# Altium PCB CE_BJTInfineonSOT343_v1.PcbDoc
Units mm, origin at the board's own origin, x right, y up, seen from the top; angles counter-clockwise.
Board outline 40 x 8 mm, 2 copper layers (Top Layer, Bottom Layer); 28 components, 11 nets, 63 pads, 4 vias.
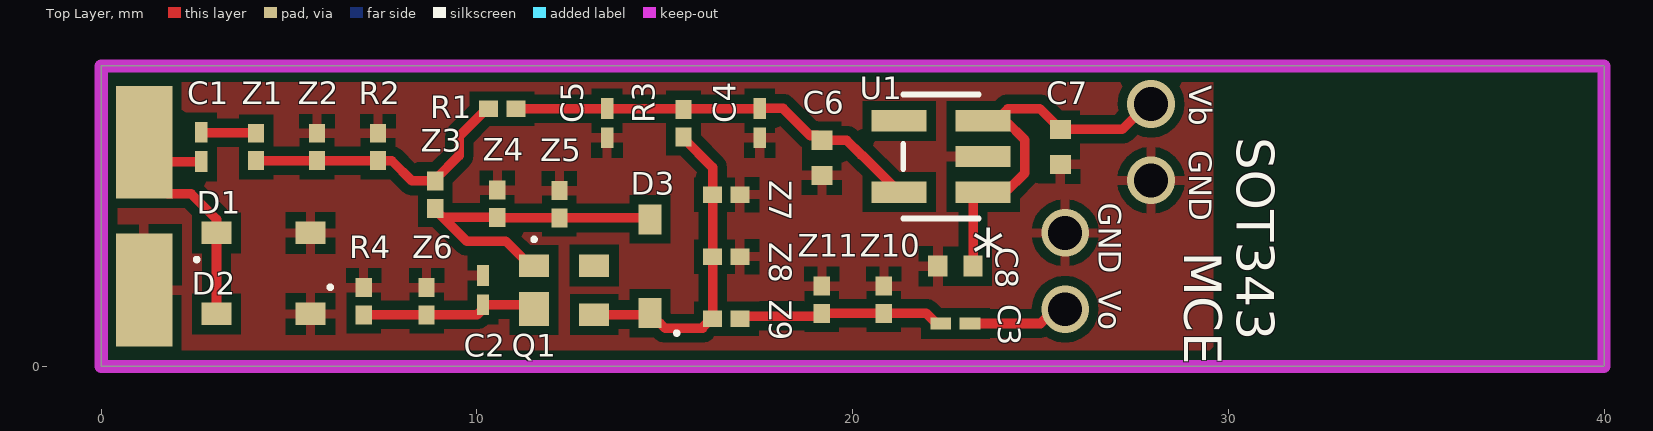
[diagram p0: Top Layer view]
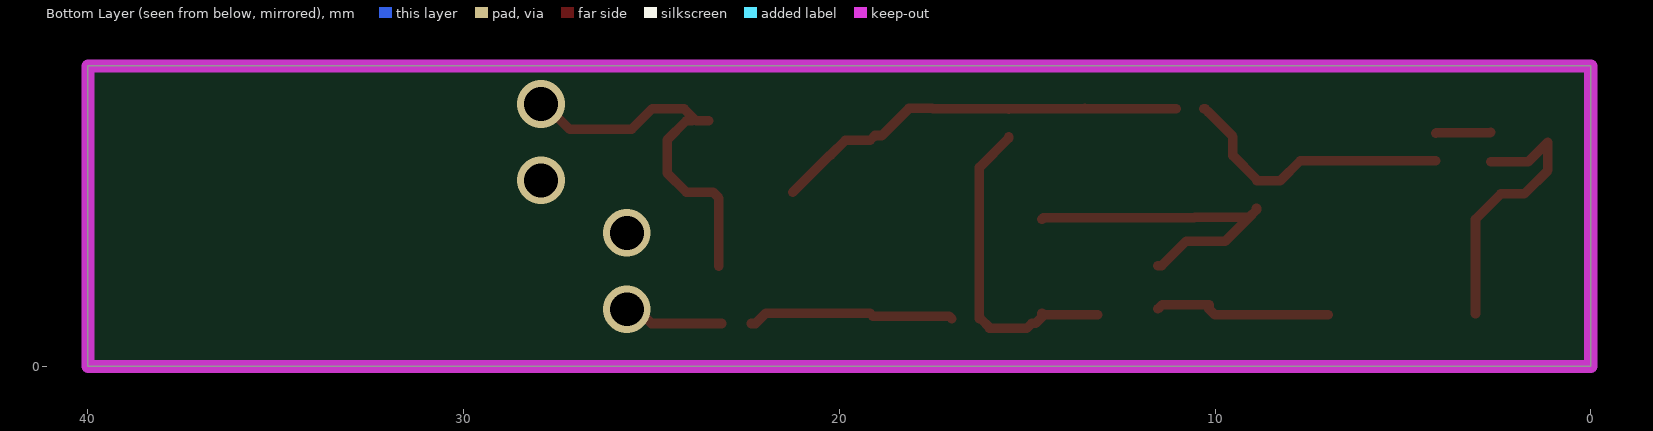
[diagram p1: Bottom Layer view, seen from below]

## Layer stack, top to bottom
Top Solder: solder mask 0.0102, Solder Resist, Dk 3.5
Top Layer: signal copper 0.0356
Dielectric 1: dielectric 0.32, FR-4, Dk 4.8
Bottom Layer: signal copper 0.0356
Bottom Solder: solder mask 0.0102, Solder Resist, Dk 3.5

## Board outline
0,0 40,0 40,8.001 0,8

## Design rules (kind name [scope] priority, off if disabled: settings)
Clearance [All] p1: gap=0.254 ignorepadtopadclearanceinfootprint=FALSE except(0: Arc-Hole Track-Hole SMDPad-Hole THPad-Hole Via-Hole Fill-Hole Poly-Hole Region-Hole Text-Hole)
PolygonConnect [All] p1: connectstyle=Relief reliefconductorwidth=0.254 reliefentries=4 polygonreliefangle="90 Angle" airgapwidth=0.254
RoomDefinition CE_BJTInfineonSOT343_v1 [InComponentClass('CE_BJTInfineonSOT343_v1')] p1: confinementstyle=ConfineIn formatcopy=TRUE lockcomponents=FALSE outline 0,8.001 40.005,8.001 40.005,0 0,0
RoutingVias [All] p1: holewidth=0.711 width=1.27 viastyle="Through Hole" minholewidth=0.711 minwidth=1.27 maxholewidth=0.711 maxwidth=1.27
SolderMaskExpansion [All] p1: expansion=0.102
Width [All] p1: maxlimit=0.254 minlimit=0.254 preferedwidth=0.254
30 further rules are at their usual default settings.

## Components (designator, comment, footprint, x,y, rotation, side; value= is the part's Value field where it differs from the comment)
C1 "Cin" C0201 2.667,5.842 r90 top value=Value
C2 "" C0201 10.16,2.032 r270 top value=Value
C3 "" C0201 22.733,1.143 r0 top value=Value
C4 "" CAP_CBR_0201 17.526,6.477 r90 top value=Value
C5 "" CAP_CBR_0201 13.462,6.477 r90 top value=Value
C6 "" YAG_CC0402 19.177,5.55 r90 top value=Value
C7 "" YAG_CC0402 25.527,5.842 r90 top value=Value
C8 "" YAG_CC0402 22.733,2.667 r0 top value=Value
D1 "" INF-SOD323_V 4.318,3.556 r90 top
D2 "" INF-SOD323_V 4.318,1.397 r270 top
D3 "" INF-SOD323_V 14.605,2.667 r180 top
Q1 "SOT343" INF-SOT343_V 12.319,2.032 r0 top
R1 "" RES_RC0201_P6XP3 10.668,6.858 r0 top value=Value
R2 "" RES_RC0201_P6XP3 7.366,5.842 r270 top value=Value
R3 "" RES_RC0201_P6XP3 15.494,6.477 r90 top value=Value
R4 "" RES_RC0201_P6XP3 6.985,1.738 r270 top value=Value
U1 "" DBV5 22.352,5.588 r180 top value=Value
Z1 "" RES_RC0201_P6XP3 4.123,5.842 r270 top value=Value
Z2 "" RES_RC0201_P6XP3 5.744,5.842 r270 top value=Value
Z3 "" RES_RC0201_P6XP3 8.89,4.572 r270 top value=Value
Z4 "" RES_RC0201_P6XP3 10.541,4.333 r270 top value=Value
Z5 "" RES_RC0201_P6XP3 12.192,4.318 r270 top value=Value
Z6 "" RES_RC0201_P6XP3 8.661,1.738 r270 top value=Value
Z7 "" RES_RC0201_P6XP3 16.637,4.572 r180 top value=Value
Z8 "" RES_RC0201_P6XP3 16.637,2.921 r180 top value=Value
Z9 "" RES_RC0201_P6XP3 16.637,1.27 r0 top value=Value
Z10 "" RES_RC0201_P6XP3 20.828,1.778 r270 top value=Value
Z11 "" RES_RC0201_P6XP3 19.177,1.778 r270 top value=Value

## Footprints (in the part's own frame and the unit in brackets; to place one, negate y for a bottom-side part, rotate by r counter-clockwise, add the part's x,y. Pads: shape width x height; smd on the part's side, far side on the other; paste and mask are expansions set on the pad)
C0201 [mil]
  rect 21.78x13 smd paste+0 mask+0: 1(-15.39,0) 2(15.39,0)
  body extent 0,0 10,10, height 10
CAP_CBR_0201 [mil]
  rect 21.78x13 smd paste+0 mask+0: 1(-15.39,0) 2(15.39,0)
  body extent 0,0 10,10, height 10
DBV5 [mil]
  rect 57.56x22.36 smd paste+0 mask+0: 1(-44,37.4) 2(-44,0) 3(-44,-37.4) 4(44,-37.4) 5(44,37.4)
  silkscreen extent -40,-65 40,65, body extent 0,0 10,10, height 10
INF-SOD323_V [mm] "SOD, 2-Leads, Body 1.7x1.25 mm"
  rect 0.6x0.8 smd: 1(0,1.25) 2(0,-1.25)
  silkscreen extent -0.76,1.73 -0.66,1.83, body extent -0.63,-0.85 0.63,0.85, height 1.1
INF-SOT343_V [mm] "SOT343, 4-Leads, Body 2x1.25 mm"
  rect 0.8x0.6 smd: 1(-0.8,0.65) 3(0.8,-0.65) 4(0.8,0.65)
  rect 0.8x0.9 smd: 2(-0.8,-0.5)
  silkscreen extent -0.85,1.3 -0.75,1.4, body extent -0.63,-1 0.63,1, height 1
RES_RC0201_P6XP3 [mm]
  rect 0.503x0.43 smd paste+0 mask+0: 1(-0.366,0) 2(0.366,0)
  body extent 0,0 0.25,0.25, height 0.25
YAG_CC0402 [mil]
  rect 20x22 smd paste+0 mask+0: 1(-18.5,0) 2(18.5,0)
  body extent 0,0 10,10, height 10

## Part data
C1 C2 C3: library part C0201C270J3GACTU, "No Description Available", Built_By=EMA_UL_Team, Copyright="Copyright (C) 2018 Accelerated Designs. All rights reserved", Manufacturer_Part_Number=C0201C270J3GACTU, RefDes=RefDes, Type=DEV, Vendor=Kemet
C4 C5: library part CBR02C399C3GAC, "No Description Available", Built_By=EMA_UL_Team, Copyright="Copyright (C) 2018 Accelerated Designs. All rights reserved", Manufacturer_Part_Number=CBR02C399C3GAC, RefDes=RefDes, Type=DEV, Vendor=KEMET
C6 C7 C8: library part CC0402KRX7R9BB10, "No Description Available", Manufacturer_Part_Number=CC0402KRX7R9BB103, Built_By=EMA_UL_Team, Copyright="Copyright (C) 2018 Accelerated Designs. All rights reserved", RefDes=RefDes, Type=DEV, Vendor=Yageo
D1 D2 D3: library part BAT15-03W, "Single Silicon Schottky Diode, 110 mA IF Max, SOD32, Green", Manufacturer=Infineon, Supplier Part Number 1=N/A, ComponentLink1Description="Manufacturer URL", ComponentLink1URL=http://www.infineon.com/, ComponentLink2Description=Datasheet, ComponentLink2URL=http://www.infineon.com/dgdl/bat15series.pdf?folderId=db3a304314dca3890114ff6812070b44&fileId=db3a304314dca3890114ff6b74ca0b48&location=en.Products.RF.RF_Mixer___Detector_Schottky_Diodes.DATASHEET.bat15series.pdf, ComponentLink3Description="Package Specification", ComponentLink3URL=http://www.infineon.com/dgdl/SOD323-Package_Overview.pdf?folderId=db3a30431936bc4b011952aab84f3bbe&fileId=db3a30431936bc4b011952beed653be3, Configuration=Single, CT (typ)="0.26 pF", DatasheetVersion=Jun-2011, Green=yes, Group="RF Mixer", IF (max)="110 mA", Mounting Technology="Surface Mount", PackageDescription="2-Pin Small Outline Diode Package, 1.25 x 1.7 mm Body", PackageReference=SOD323, PartNumber=BAT15-03W, Supplier 1=Mouser, VF (typ)="0.23 V", VR (max)="4 V"
Q1: library part BFP840ESD, "Robust Low Noise Silicon Germanium Bipolar RF Transistor, 2.25 V VCEO, 35 mA IC, 33.5 dB Gmax, SOT343, Green", Manufacturer=Infineon, ComponentLink1Description="Manufacturer URL", ComponentLink1URL=http://www.infineon.com/, ComponentLink2Description=Datasheet, ComponentLink2URL=http://www.infineon.com/dgdl/Infineon_Robust_WiFi_SiGe_LNA_BFP840ESD_Rev1_1.pdf?folderId=db3a30431f848401011fcbf2ab4c04c4&fileId=db3a304336ca04c90136e88a4d5f35b7&location=en.Products.RF.RF_Transistors_.Ultra_Low_Noise_SiGe_C_Transistors_for_use_up_to_12_GHz.DATASHEET.Infineon_Robust_WiFi_SiGe_LNA_BFP840ESD_Rev1_1.pdf, ComponentLink3Description="Package Specification", ComponentLink3URL=http://www.infineon.com/dgdl/SOT343-Package_Overview.pdf?folderId=db3a30431936bc4b0119535155343cba&fileId=db3a30431936bc4b0119535a9f393cd3, DatasheetVersion="Rev. 1.1", Gmax (typ)="33.5 dB", Green=yes, Group="Robust ultra low noise SiGe", Halogen-free=yes, IC (max)="35 mA", Mounting Technology="Surface Mount", NFmin (typ)="0.6 dB", PackageDescription="4-Pin Small Outline Transistor Package, 1.25 x 2 mm Body", PackageReference=SOT343, PartNumber=BFP840ESD, Ptot (max)="75.0 mW", VCEO (max)="2.25 V"
R1 R2 R3 R4 Z1 Z2 Z3 Z4 Z5 Z6 Z7 Z8 Z9 Z10 Z11: library part RC0201FR-0718KL, "No Description Available", Built_By=EMA_Anthony, Copyright="Copyright (C) 2018 Accelerated Designs. All rights reserved", Manufacturer_Part_Number=RC0201FR-0718KL, RefDes=RefDes, Type=DEV, Vendor=Yageo
U1: library part LP5907MFX-3.3/NO, "No Description Available", Manufacturer_Part_Number=LP5907MFX-3.3/NOPB, Built_By=EMA_UL_Team, Copyright="Copyright (C) 2018 Accelerated Designs. All rights reserved", RefDes=RefDes, Type=DEV, Vendor="Texas Instruments"

## Free pads (board coordinates)
  rect 1.5x3 smd: ""(1.143,2.032) ""(1.143,5.969)

## Via types
v1: diameter 1.27, hole 0.9, Top Layer to Bottom Layer, 4 vias

## Nets (pads, with @x,y where several pads share a name; then routed paths per layer and width w, separated by ;. In a path a pad name is that pad's centre, name@x,y a point inside that pad or via, vN(x,y) a via of type N, cw(c..) or ccw(c..) an arc to the next point about the centre after c; other vN are vias at no path point)
B: D3.2 Q1.1 Z3.2 Z4.2 Z5.2 | length 8.8
  Top Layer w0.254: Z3.2@8.898,4.214 Z3.2 8.89,4.17 Z3.2@9.092,3.967 ; Q1.1 11.419,2.682 10.766,3.335 9.725,3.335 Z3.2@9.092,3.967 ; D3.2 14.57,3.952 Z5.2 12.184,3.96 10.549,3.96 Z4.2 Z3.2@9.092,3.967
C: D3.1 Q1.3 R3.1 Z7.2 Z8.2 Z9.1 | length 8.7
  Top Layer w0.254: Q1.3 14.57,1.382 D3.1 14.605,1.317 14.778,1.144 14.878,1.144 15.006,1.016 16.002,1.016 16.002,1.037 16.235,1.27 Z9.1 Z8.2 Z7.2 16.271,5.298 15.494,6.075 R3.1
E: C2.2 Q1.2 R4.2 Z6.2 | length 4.8
  Top Layer w0.254: R4.2 Z6.2 10.002,1.372 10.16,1.53 C2.2 11.41,1.641 Q1.2
GND: C2.1 C4.1 C5.1 C6.1 C7.1 C8.1 D1.2 D2.1 pad.@1.143,2.032 R2.1 R4.1 U1.2 Z2.1 Z4.1 Z5.1 Z6.1 Z7.1 Z8.1 Z10.1 Z11.1
  other v1: 25.654,3.556 27.94,4.953
N1: C1.2 Z1.1 | length 1.5
  Top Layer w0.254: C1.2 2.68,6.22 4.11,6.22 Z1.1
N2: R1.1 R2.2 Z1.2 Z2.2 Z3.1 | length 7.5
  Top Layer w0.254: Z1.2 Z2.2 R2.2 7.732,5.476 8.27,4.938 Z3.1 8.89,4.974 9.525,5.609 9.525,6.117 10.178,6.77 10.266,6.858 R1.1
N3: C3.1 Z9.2 Z10.2 Z11.2 | length 5.5
  Top Layer w0.254: Z9.2 17.074,1.341 19.106,1.341 Z11.2 Z10.2 21.961,1.412 22.231,1.143 C3.1
Vbatt: C7.2 C8.2 U1.1 U1.3 | length 10.3
  Top Layer w0.254: C8.2 23.203,4.481 23.36,4.638 U1.1 24.073,4.638 24.582,5.146 24.582,6.03 24.073,6.538 U1.3@23.917,6.538 ; U1.3 23.81,6.538 24.13,6.858 24.981,6.858 C7.2 27.176,6.312 27.849,6.985 v1(27.94,6.985)
Vcc: C4.2 C5.2 C6.2 R1.2 R3.2 U1.5 | length 11.1
  Top Layer w0.254: R1.2 13.452,6.858 C5.2 13.475,6.855 15.482,6.855 R3.2 15.506,6.855 17.513,6.855 C4.2 18.147,6.868 18.868,6.147 19.05,6.147 C6.2 19.837,6.02 20.234,5.623 20.249,5.623 U1.5
Vin: C1.1 D1.1 D2.2 pad.@1.143,5.969 | length 7.5
  Top Layer w0.254: C1.1 1.661,5.451 1.143,5.969 1.143,5.219 1.766,4.596 2.389,4.596 3.068,3.917 D1.1 D2.2
Vout: C3.2 | length 2.7
  Top Layer w0.254: C3.2 24.998,1.143 25.379,1.524 v1(25.654,1.524)
pads on no net: Q1.4 U1.4

## Polygon pours and split planes (outlines as drawn)
GND on Top Layer "Top Layer-No Net 1" (solid, pour order 14): 0.127,7.747 0.254,7.874 29.463,8.002 29.591,7.874 29.593,0.256 29.336,-0.001 0.381,0.127 0.127,0.381

## Keep-outs
Keep-Out Layer:
  the board outline again, w0.35

## Silkscreen, mask and mechanical layers (free items; w line width, h text height)
Top Overlay:
  text "Vb" at 28.956,7.485 h0.6 r270
  text "SOT343" at 30.226,6.096 h1 r270
  text "GND" at 28.956,5.753 h0.6 r270
  text "GND" at 26.543,4.356 h0.6 r270
  text "MCE" at 28.829,3.048 h1 r270
  text "Vo" at 26.543,2.024 h0.6 r270

## Text inside footprints (layer, text, board x,y; h text height)
U1: Top Overlay "*" at 24.041,4.197 h1.27 r180; Mechanical 13 "*" at 23.292,5.162 h1.27 r180